# EAGLE board LTTO-medic-remote (EAGLE 6.5.0)
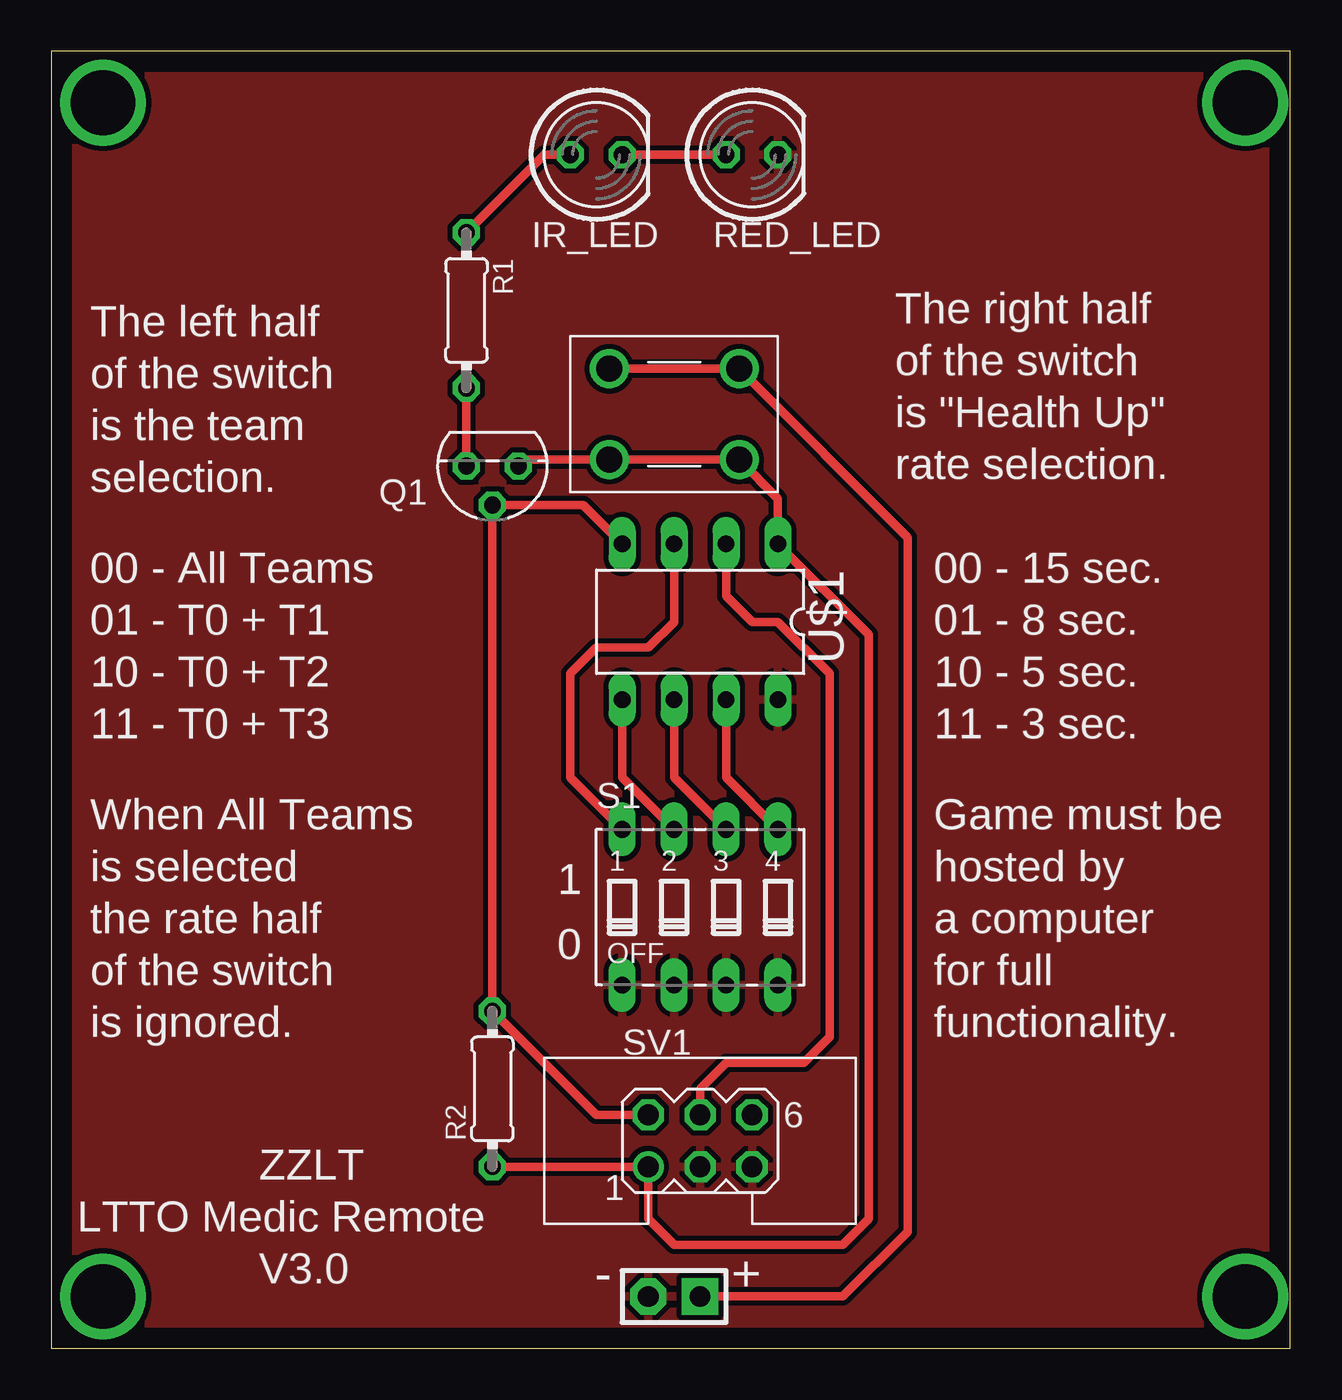
[diagram p0: board, top side]

Size 60.63 x 63.49 mm. Coordinates in mm from the lower left corner, seen from the top.
Outline: 0,0 60.63,0 60.63,63.49 0,63.49 0,0
Copper layers (1*16): Top 0.035mm / dielectric 1.5mm / Bottom 0.035mm
Design rules "default": minimum track width 10mil, minimum drill 24mil, track to track 8mil, track to pad 8mil, pad to pad 8mil, via to via 8mil, smd to smd 8mil, copper to edge 40mil, drill to drill 8mil, minimum pad ring 10mil, minimum via ring 8mil, stop-mask expansion 4mil, vias tented up to drill 0mil, thermal gap 10mil

## Footprints (pad centres in the part's own frame; a part is rotated, then mirrored left to right if it is on the bottom)
LED5MM = drill 0.813 octagon: A -1.27,0; K 1.27,0
SIP-100-02-40 = drill 1.016 pad 1.778 square: 1 -1.27,0 | drill 1.016 pad 1.778 octagon: 2 1.27,0
TO92 = drill 0.813 octagon: 1 1.27,0; 2 0,1.905; 3 -1.27,0
0204/7 = drill 0.813 octagon: 1 -3.81,0; 2 3.81,0
DIP04S = drill 0.813 long: 1 -3.81,-3.81; 2 -1.27,-3.81; 3 1.27,-3.81; 4 3.81,-3.81; 5 3.81,3.81; 6 1.27,3.81; 7 -1.27,3.81; 8 -3.81,3.81
MA03-2 = drill 1.016: 1 -2.54,-1.27 | drill 1.016 octagon: 2 -2.54,1.27; 3 0,-1.27; 4 0,1.27; 5 2.54,-1.27; 6 2.54,1.27
DIL8 = drill 0.813 long: 1 -3.81,-3.81; 2 -1.27,-3.81; 3 1.27,-3.81; 4 3.81,-3.81; 5 3.81,3.81; 6 1.27,3.81; 7 -1.27,3.81; 8 -3.81,3.81
PUSHBUTTON = drill 1.27: P$1 -3.175,2.223; P$2 3.175,2.223; P$3 3.175,-2.223; P$4 -3.175,-2.223

## Placement (x,y rotation side)
IR_LED  [LED5MM]  26.67,58.42 0 top
J1  F-1X02-SIP-100-40  [SIP-100-02-40]  30.48,2.54 180 top
Q1  2N3906  [TO92]  21.59,43.18 180 top
R1  150  [0204/7]  20.32,50.8 270 top
R2  10k  [0204/7]  21.59,12.7 90 top
RED_LED  [LED5MM]  34.29,58.42 0 top
S1  [DIP04S]  31.75,21.59 0 top
SV1  [MA03-2]  31.75,10.16 0 top
U$1  Z8F082ADIL-8  [DIL8]  31.75,35.56 180 top
U$2  PUSHBUTTON  [PUSHBUTTON]  30.48,45.72 0 top

## Library data of the parts
IR_LED RED_LED = led
J1 = con-headers-jp
Q1 = transistor-pnp
R1 R2 = resistor
S1 = switch-dil; OC_FARNELL: unknown; OC_NEWARK: unknown
SV1 = izzy; OC_FARNELL: unknown; OC_NEWARK: unknown
U$1 U$2 = izzy

## Nets
+BAT: J1.1 U$2.P$1 U$2.P$2
+SW_BAT: Q1.3 R2.1 SV1.1 U$1.1 U$2.P$3 U$2.P$4
DEBUG: SV1.4 U$1.2
DIP1: S1.8 U$1.3
DIP2: S1.7 U$1.5
DIP3: S1.6 U$1.6
DIP4: S1.5 U$1.7
GND: J1.2 RED_LED.K S1.1 S1.2 S1.3 S1.4 SV1.3 SV1.5 U$1.8
LED_OUT: Q1.2 R2.2 SV1.2 U$1.4
N$1: Q1.1 R1.2
N$2: IR_LED.A R1.1
N$3: IR_LED.K RED_LED.A

## Tracks (layer width: path | path; a pad name or v marks a point on that pad's centre or on a via)
+BAT
  Top 0.406: J1.1 38.73,2.54 41.91,5.71 41.91,39.69 U$2.P$2 U$2.P$1
+SW_BAT
  Top 0.406: R2.1 SV1.1 29.21,6.35 30.48,5.08 38.73,5.08 40.01,6.35 40.01,34.92 U$1.1 35.56,41.59 U$2.P$3 U$2.P$4 23.18,43.5 Q1.3
DEBUG
  Top 0.406: U$1.2 33.02,36.83 34.29,35.56 35.56,35.56 38.1,33.02 38.1,15.24 36.83,13.97 33.02,13.97 31.75,12.7 SV1.4
DIP1
  Top 0.406: S1.8 25.4,27.94 25.4,33.02 26.67,34.29 29.21,34.29 30.48,35.56 U$1.3
DIP2
  Top 0.406: S1.7 27.94,27.94 U$1.5
DIP3
  Top 0.406: S1.6 30.48,27.94 U$1.6
DIP4
  Top 0.406: S1.5 33.02,27.94 U$1.7
GND
  pour Top (isolate 0.254): 0,63.5 60.96,63.5 60.96,0 0,0
LED_OUT
  Top 0.406: SV1.2 26.67,11.43 R2.2 Q1.2 26.04,41.27 U$1.4
N$1
  Top 0.406: Q1.1 R1.2
N$2
  Top 0.406: R1.1 24.13,58.42 IR_LED.A
N$3
  Top 0.406: IR_LED.K RED_LED.A
N$4  (via drill 3.17)
  other vias: 2.54,2.54
N$5  (via drill 3.17)
  other vias: 2.54,60.96
N$6  (via drill 3.17)
  other vias: 58.42,60.96
N$7  (via drill 3.17)
  other vias: 58.42,2.54

## Text on the board
tNames: The left half | The right half | of the switch | of the switch | is "Health Up" | is the team | rate selection. | selection. | 00 - All Teams | 00 - 15 sec. | 01 - T0 + T1 | 01 - 8 sec. | 10 - T0 + T2 | 10 - 5 sec. | 11 - T0 + T3 | 11 - 3 sec. | When All Teams | Game must be | is selected | hosted by | 1 | the rate half | a computer | 0 | of the switch | for full | is ignored. | functionality. | ZZLT | LTTO Medic Remote | - | V3.0 | +